# EAGLE board HoneyPI_Platine TimerBoard 2.0 (EAGLE 9.6.2)
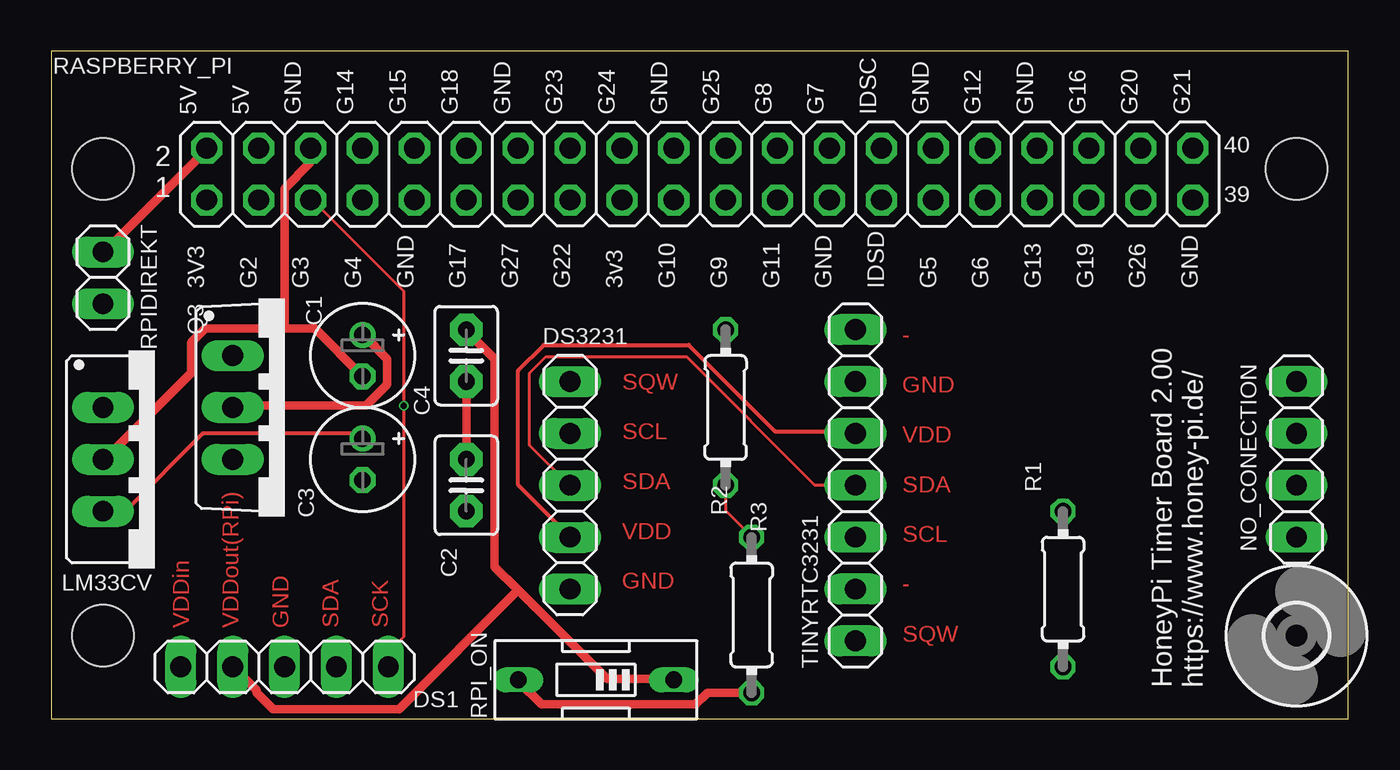
[diagram p0: board, top side]
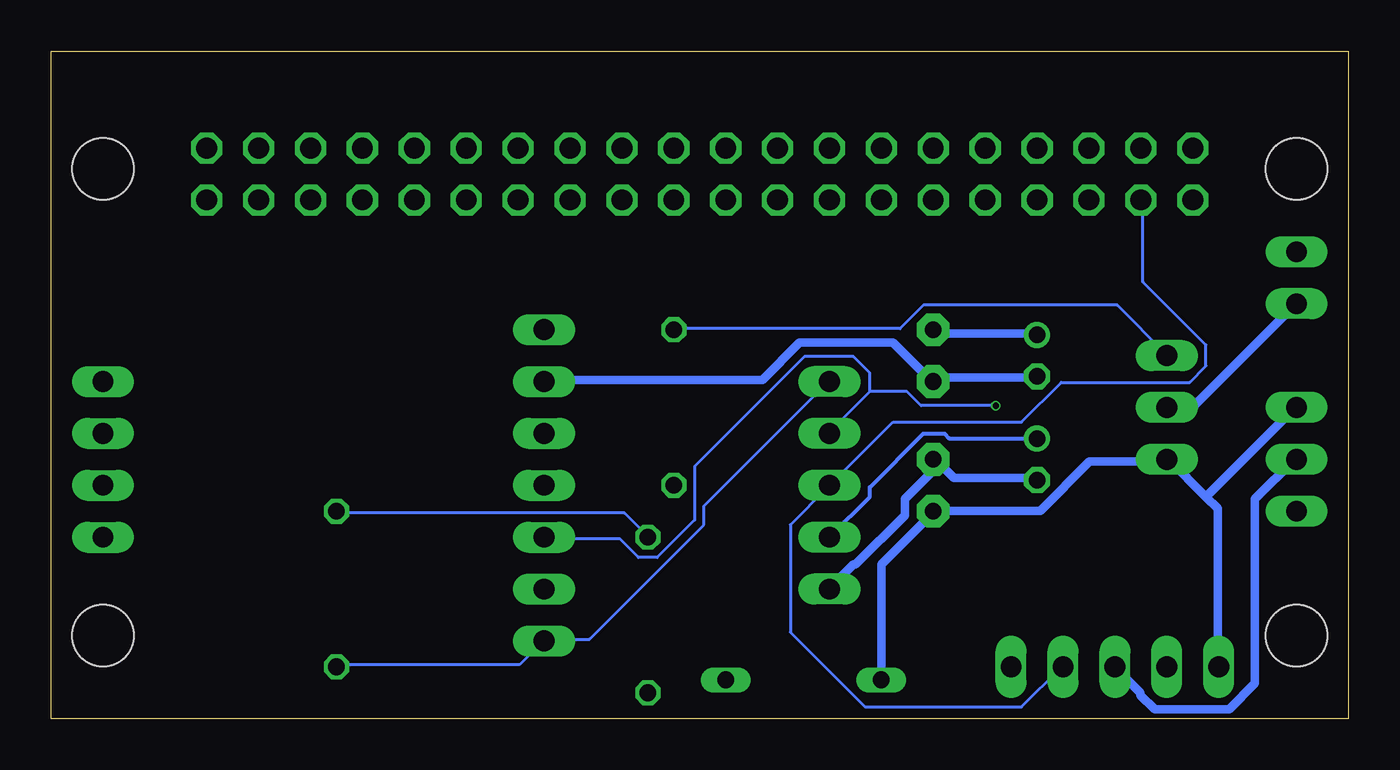
[diagram p1: board, bottom side, seen from below]

Size 63.5 x 32.69 mm. Coordinates in mm from the lower left corner, seen from the top.
Outline: 0,0 63.5,0 63.5,32.69 0,32.69 0,0
Copper layers (1*16): Top 0.035559375mm / dielectric 1.6mm / Bottom 0.035559375mm
Design rules "jlcpcb2layer": minimum track width 5mil, minimum drill 12mil, track to track 5mil, track to pad 5mil, pad to pad 5mil, via to via 5mil, smd to smd 5mil, copper to edge 8mil, drill to drill 6mil, minimum pad ring 5mil, minimum via ring 3mil, stop-mask expansion 2.5mil, vias tented up to drill 0mil, thermal gap 10mil
Net classes: 0 Signal: width 0.152 mm, clearance 0.305 mm; 1 Supply3v3: width 0.203 mm, clearance 0.305 mm; 2 Supply5v: width 0.406 mm, clearance 0.305 mm
Holes 3 mm at 2.54,26.92 2.54,4.06 60.96,26.92

## Footprints (pad centres in the part's own frame; a part is rotated, then mirrored left to right if it is on the bottom)
E2-5 = drill 0.813 pad 1.27: + -1.016,0 | drill 0.813 pad 1.27 octagon: - 1.016,0
C2.5-3 = drill 0.813 pad 1.6 octagon: 1 -1.27,0; 2 1.27,0
1X05 = drill 1.016 long: 1 -5.08,0; 2 -2.54,0; 3 0,0; 4 2.54,0; 5 5.08,0
337TS = drill 1.016 long: 1 -2.54,-2.54; 2 0,-2.54; 3 2.54,-2.54
1X04 = drill 1.016 long: 1 -3.81,0; 2 -1.27,0; 3 1.27,0; 4 3.81,0
TO220BV = drill 1.016 long: D 0,-2.54; G -2.54,-2.54; S 2.54,-2.54
0204/7 = drill 0.813 octagon: 1 -3.81,0; 2 3.81,0
2X20 = drill 1.016 octagon: 1 -24.13,-1.27; 2 -24.13,1.27; 3 -21.59,-1.27; 4 -21.59,1.27; 5 -19.05,-1.27; 6 -19.05,1.27; 7 -16.51,-1.27; 8 -16.51,1.27; 9 -13.97,-1.27; 10 -13.97,1.27; 11 -11.43,-1.27; 12 -11.43,1.27; 13 -8.89,-1.27; 14 -8.89,1.27; 15 -6.35,-1.27; 16 -6.35,1.27; 17 -3.81,-1.27; 18 -3.81,1.27; 19 -1.27,-1.27; 20 -1.27,1.27; 21 1.27,-1.27; 22 1.27,1.27; 23 3.81,-1.27; 24 3.81,1.27; 25 6.35,-1.27; 26 6.35,1.27; 27 8.89,-1.27; 28 8.89,1.27; 29 11.43,-1.27; 30 11.43,1.27; 31 13.97,-1.27; 32 13.97,1.27; 33 16.51,-1.27; 34 16.51,1.27; 35 19.05,-1.27; 36 19.05,1.27; 37 21.59,-1.27; 38 21.59,1.27; 39 24.13,-1.27; 40 24.13,1.27
EDG-01 = drill 0.813 long: 1 0,-3.81; 2 0,3.81
1X02 = drill 1.016 long: 1 -1.27,0; 2 1.27,0
1X07 = drill 1.016 long: 1 -7.62,0; 2 -5.08,0; 3 -2.54,0; 4 0,0; 5 2.54,0; 6 5.08,0; 7 7.62,0
3,0 = hole 3: 0,0

## Placement (x,y rotation side)
C1  100µF  [E2-5]  15.24,17.78 270 top
C2  0,1µF  [C2.5-3]  20.32,11.43 270 top
C3  10µF  [E2-5]  15.24,12.7 270 top
C4  0,1µF  [C2.5-3]  20.32,17.78 90 top
DS1  [1X05]  11.43,2.54 0 top
DS3231  [1X05]  25.4,11.43 270 top
LM33CV  [337TS]  5.08,12.7 270 top
NO_CONECTION  [1X04]  60.96,12.7 90 top
Q3  IRF9540  [TO220BV]  11.43,15.24 270 top
R1  2,2KOhm  [0204/7]  49.53,6.35 270 top
R2  10KOhm  [0204/7]  34.29,5.08 270 top
R3  220Ohm  [0204/7]  33.02,15.24 90 top
RASPBERRY_PI  [2X20]  31.75,26.67 0 top
RPI_ON  [EDG-01]  26.67,1.91 90 top
RPIDIREKT  [1X02]  2.54,21.59 270 top
TINYRTC3231  [1X07]  39.37,11.43 90 top
U$7  [3,0]  60.96,4.06 0 top

## Library data of the parts
C1 C3 = rcl; SPICEPREFIX: C
C2 C4 = capacitor-wima
DS1 DS3231 NO_CONECTION RASPBERRY_PI RPIDIREKT TINYRTC3231 = pinhead
LM33CV = LM33cv
Q3 = transistor-power
R1-R3 = rcl; SPICEPREFIX: R
RPI_ON = special
U$7 = holes

## Nets
3V3_PIN1 [Supply3v3]: RASPBERRY_PI.1
5V_PIN2 [Supply5v]: RASPBERRY_PI.2 RPIDIREKT.1
ALARM_SQW: DS3231.1 R1.2 TINYRTC3231.1
BME_SCL/SCK_PIN5: DS1.5 DS3231.2 RASPBERRY_PI.5 TINYRTC3231.3
BME_SDI/SDA_PIN3: DS1.4 DS3231.3 RASPBERRY_PI.3 TINYRTC3231.4
GND2 [Supply5v]: C1.- C2.1 C3.- C4.1 DS1.3 DS3231.5 LM33CV.2 RASPBERRY_PI.6 TINYRTC3231.6
N$3: Q3.G R3.2
N$9: R1.1 R2.1 R3.1
V_IN [Supply5v]: C2.2 DS1.1 LM33CV.1 Q3.S R2.2 RPI_ON.2
V_LF33CV [Supply3v3]: C3.+ DS3231.4 LM33CV.3 TINYRTC3231.5
V_OUT [Supply5v]: C1.+ C4.2 DS1.2 Q3.D RPI_ON.1 RPIDIREKT.2

## Tracks (layer width: path | path; a pad name or v marks a point on that pad's centre or on a via)
5V_PIN2
  Top 0.406: RPIDIREKT.1 2.63,22.87 7.66,27.9 RASPBERRY_PI.2
ALARM_SQW
  Bottom 0.152: R1.2 49.49,2.64 40.58,2.64 39.43,3.78 TINYRTC3231.1 39.32,3.9 37.15,3.9 31.55,9.5 31.55,10.41 25.49,16.47 DS3231.1
BME_SCL/SCK_PIN5  (via drill 0.3)
  Top 0.152: DS1.5 16.57,2.64 16.57,3.33 17.26,4.01 v17.26,15.33 17.26,20.93 12.8,25.39 RASPBERRY_PI.5
  Bottom 0.152: 23.43,16.02 23.43,16.93 24.23,17.73 26.63,17.73 32,12.36 32,9.73 33.83,7.9 34.75,7.9 35.66,8.81 39.32,8.81 TINYRTC3231.3 | 23.43,16.02 25.38,14.07 DS3231.2 | 23.43,16.02 21.6,16.02 20.92,15.33 v17.26,15.33
BME_SDI/SDA_PIN3
  Top 0.152: TINYRTC3231.4 39.32,11.44 37.38,11.44 31.09,17.73 24.23,17.73 23.43,16.93 23.43,13.39 25.38,11.44 DS3231.3
  Bottom 0.152: RASPBERRY_PI.3 10.06,25.39 10.06,21.39 6.97,18.3 6.97,17.27 7.77,16.47 14.06,16.47 16,14.53 22.29,14.53 25.38,11.44 DS3231.3 25.49,11.33 27.32,9.5 27.32,4.24 23.66,0.58 16,0.58 14.06,2.53 DS1.4
GND2
  Top 0.406: 11.43,19.1 12.92,19.1 15.2,16.81 C1.- | 11.43,19.1 7.54,19.1 6.86,18.41 6.86,16.93 2.63,12.7 LM33CV.2 | 11.43,19.1 11.43,25.96 12.69,27.22 12.69,27.9 RASPBERRY_PI.6 | C2.1 20.34,12.7 20.34,16.47 C4.1
  Bottom 0.406: C3.- 15.32,11.79 19.32,11.79 20.23,12.7 C2.1 20.12,12.36 21.72,10.76 21.72,9.96 24.12,7.56 24.23,7.56 25.38,6.41 DS3231.5 | C1.- 15.32,16.7 20.12,16.7 20.23,16.59 C4.1 20.46,16.59 22.29,18.41 26.86,18.41 28.69,16.59 39.32,16.59 TINYRTC3231.6 | DS1.3 11.43,2.53 10.17,1.27 10.17,1.16 9.49,0.47 5.83,0.47 4.57,1.73 4.57,10.76 2.63,12.7 LM33CV.2
N$3
  Bottom 0.152: R3.2 32.92,19.1 21.95,19.1 20.8,20.24 11.32,20.24 8.91,17.84 Q3.G
N$9
  Top 0.152: R3.1 33.03,11.33 33.03,10.19 34.29,8.93 R2.1
  Bottom 0.152: R1.1 49.49,10.07 35.43,10.07 34.29,8.93 R2.1
V_IN
  Top 0.406: R2.2 32.12,1.27 31.55,0.7 24,0.7 22.86,1.84 RPI_ON.2
  Bottom 0.406: 6.97,10.87 8.8,12.7 Q3.S 9.03,12.59 12.69,12.59 15.09,10.19 20.12,10.19 C2.2 20.34,10.07 22.86,7.56 RPI_ON.2 | 6.97,10.87 6.4,10.3 6.4,2.64 DS1.1 | 6.97,10.87 2.63,15.22 LM33CV.1
V_LF33CV
  Top 0.203: LM33CV.3 2.63,10.19 3.66,10.19 7.43,13.96 14.97,13.96 15.2,13.73 C3.+ | TINYRTC3231.5 39.32,14.07 35.43,14.07 31.2,18.3 24.12,18.3 22.86,17.04 22.86,11.44 25.38,8.93 DS3231.4
  Bottom 0.203: C3.+ 15.32,13.73 19.55,13.73 19.77,13.96 20.8,13.96 23.43,11.33 23.43,10.87 25.38,8.93 DS3231.4
V_OUT
  Top 0.406: 22.86,6.3 21.72,7.44 21.72,17.61 20.34,18.99 C4.2 | 22.86,6.3 27.2,1.96 30.4,1.96 RPI_ON.1 | 22.86,6.3 17.03,0.47 10.86,0.47 10.06,1.27 10.06,1.38 8.91,2.53 DS1.2 | Q3.D 8.91,15.33 15.43,15.33 16.46,16.36 16.46,17.61 15.32,18.76 C1.+
  Bottom 0.406: Q3.D 8.8,15.33 7.54,15.33 2.63,20.24 RPIDIREKT.2 | C1.+ 15.32,18.87 20.12,18.87 20.23,18.99 C4.2

## Text on the board
Top: SQW / / SCL / / SDA / / VDD / / GND | VDDin / / VDDout(RPi) / / GND / / SDA / / SCK | - / / GND / / VDD / / SDA / / SCL / / - / / SQW
tNames: 5V / / 5V / / GND / / G14 / / G15 / / G18 / / GND / / G23 / / G24 / / GND / / G25 / / G8 / / G7 / / IDSC / / GND / / G12 / / GND / / G16 / / G20 / / G21 | 2 / 1 | 40 / / 39 | 3V3 / / G2 / / G3 / / G4 / / GND / / G17 / / G27 / / G22 / / 3v3 / / G10 / / G9 / / G11 / / GND / / IDSD / / G5 / / G6 / / G13 / / G19 / / G26 / / GND | HoneyPi Timer Board 2.00 / https://www.honey-pi.de/